# Altium PCB PcbDesign.PcbDoc
Units mil, origin at the board's own origin, x right, y up, seen from the top; angles counter-clockwise.
Board outline 3700.79 x 3700.79 mil, 2 copper layers (Top Layer, Bottom Layer), stack 65.792 mil thick; 1 components, 3 nets, 5 pads, 0 vias.
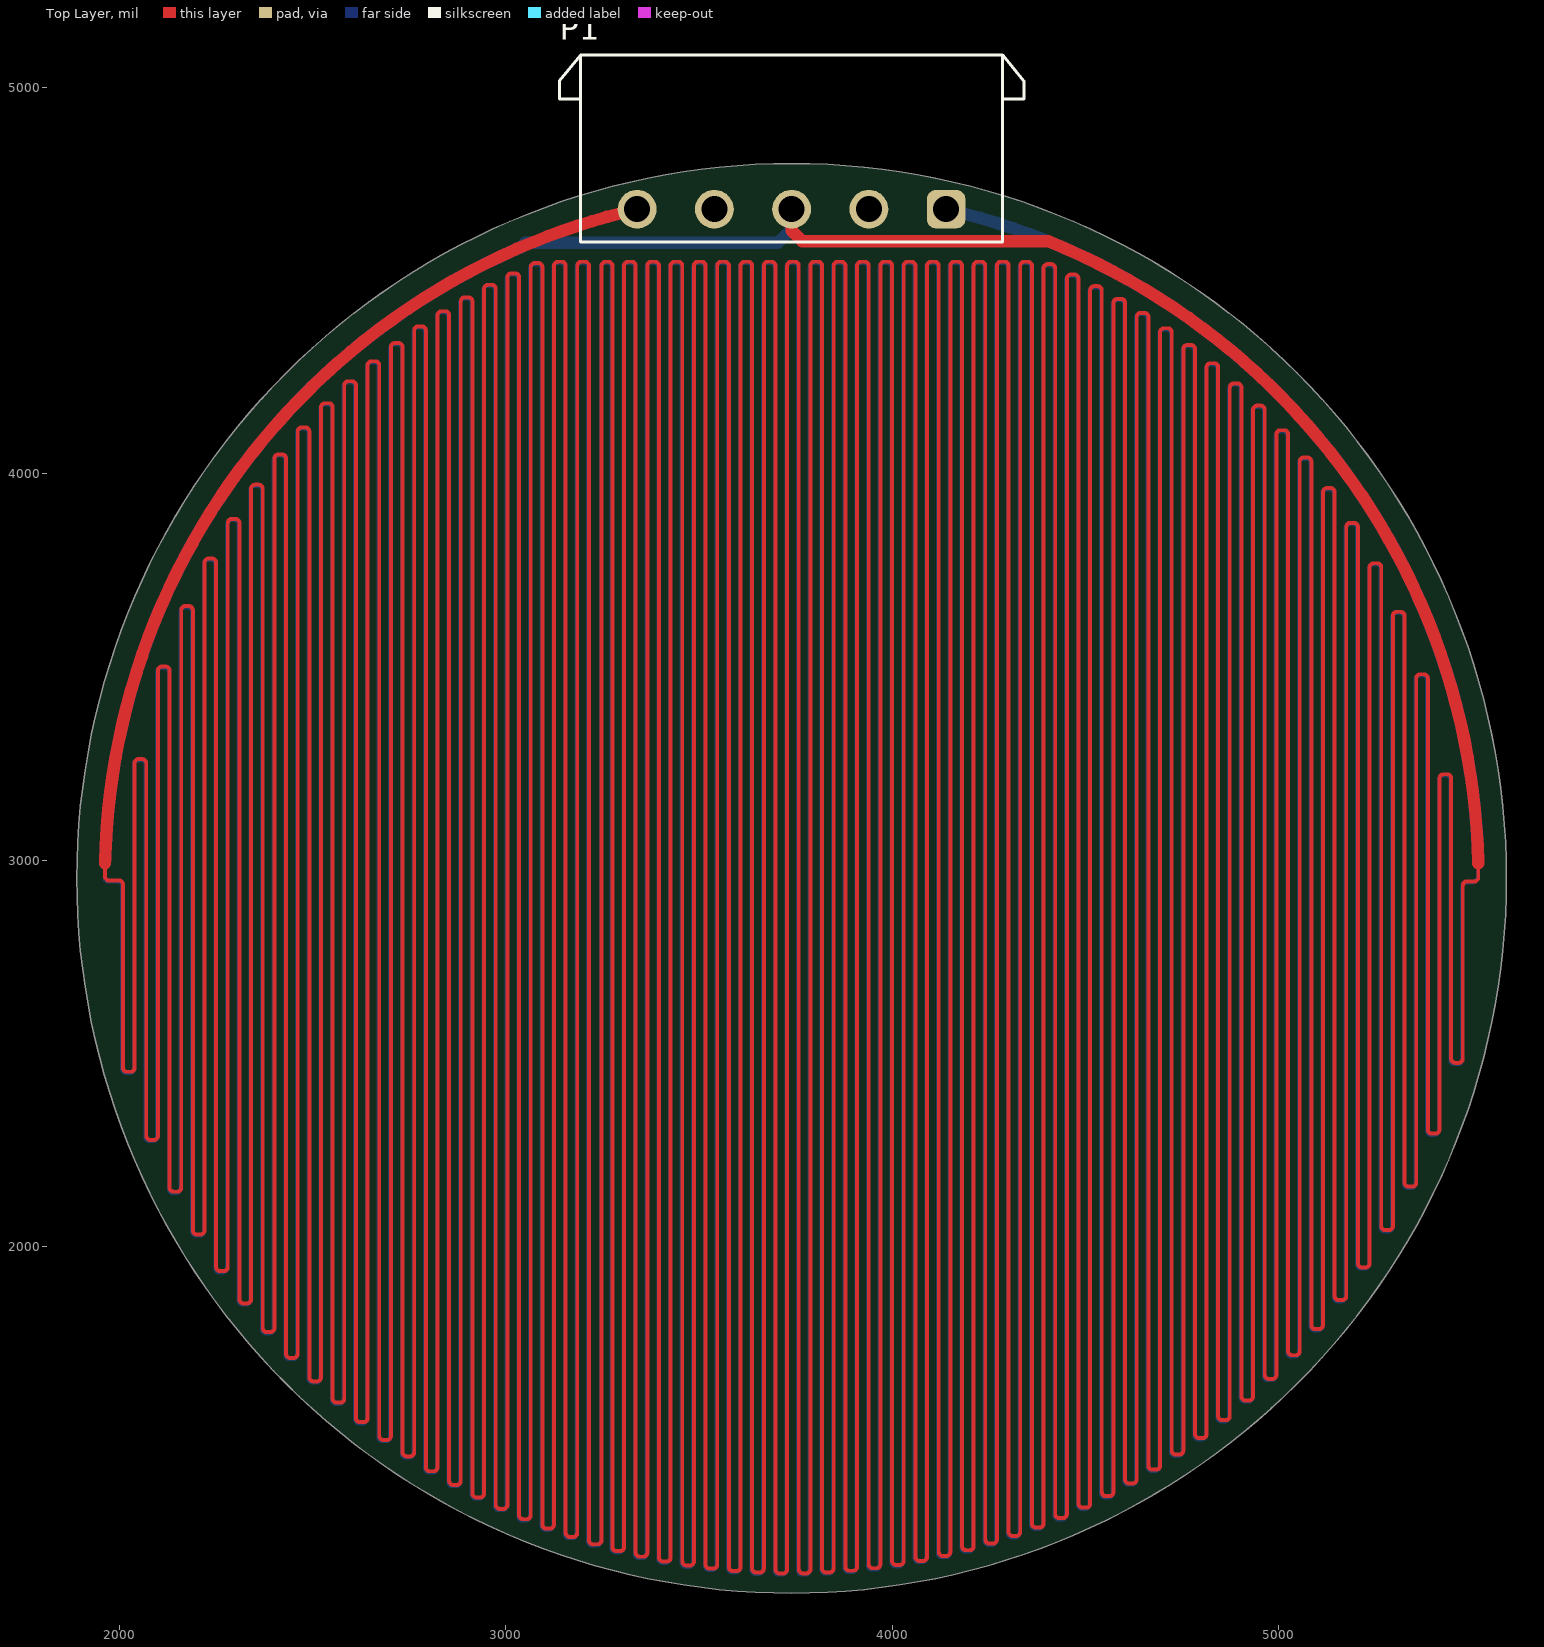
[diagram p0: Top Layer view]
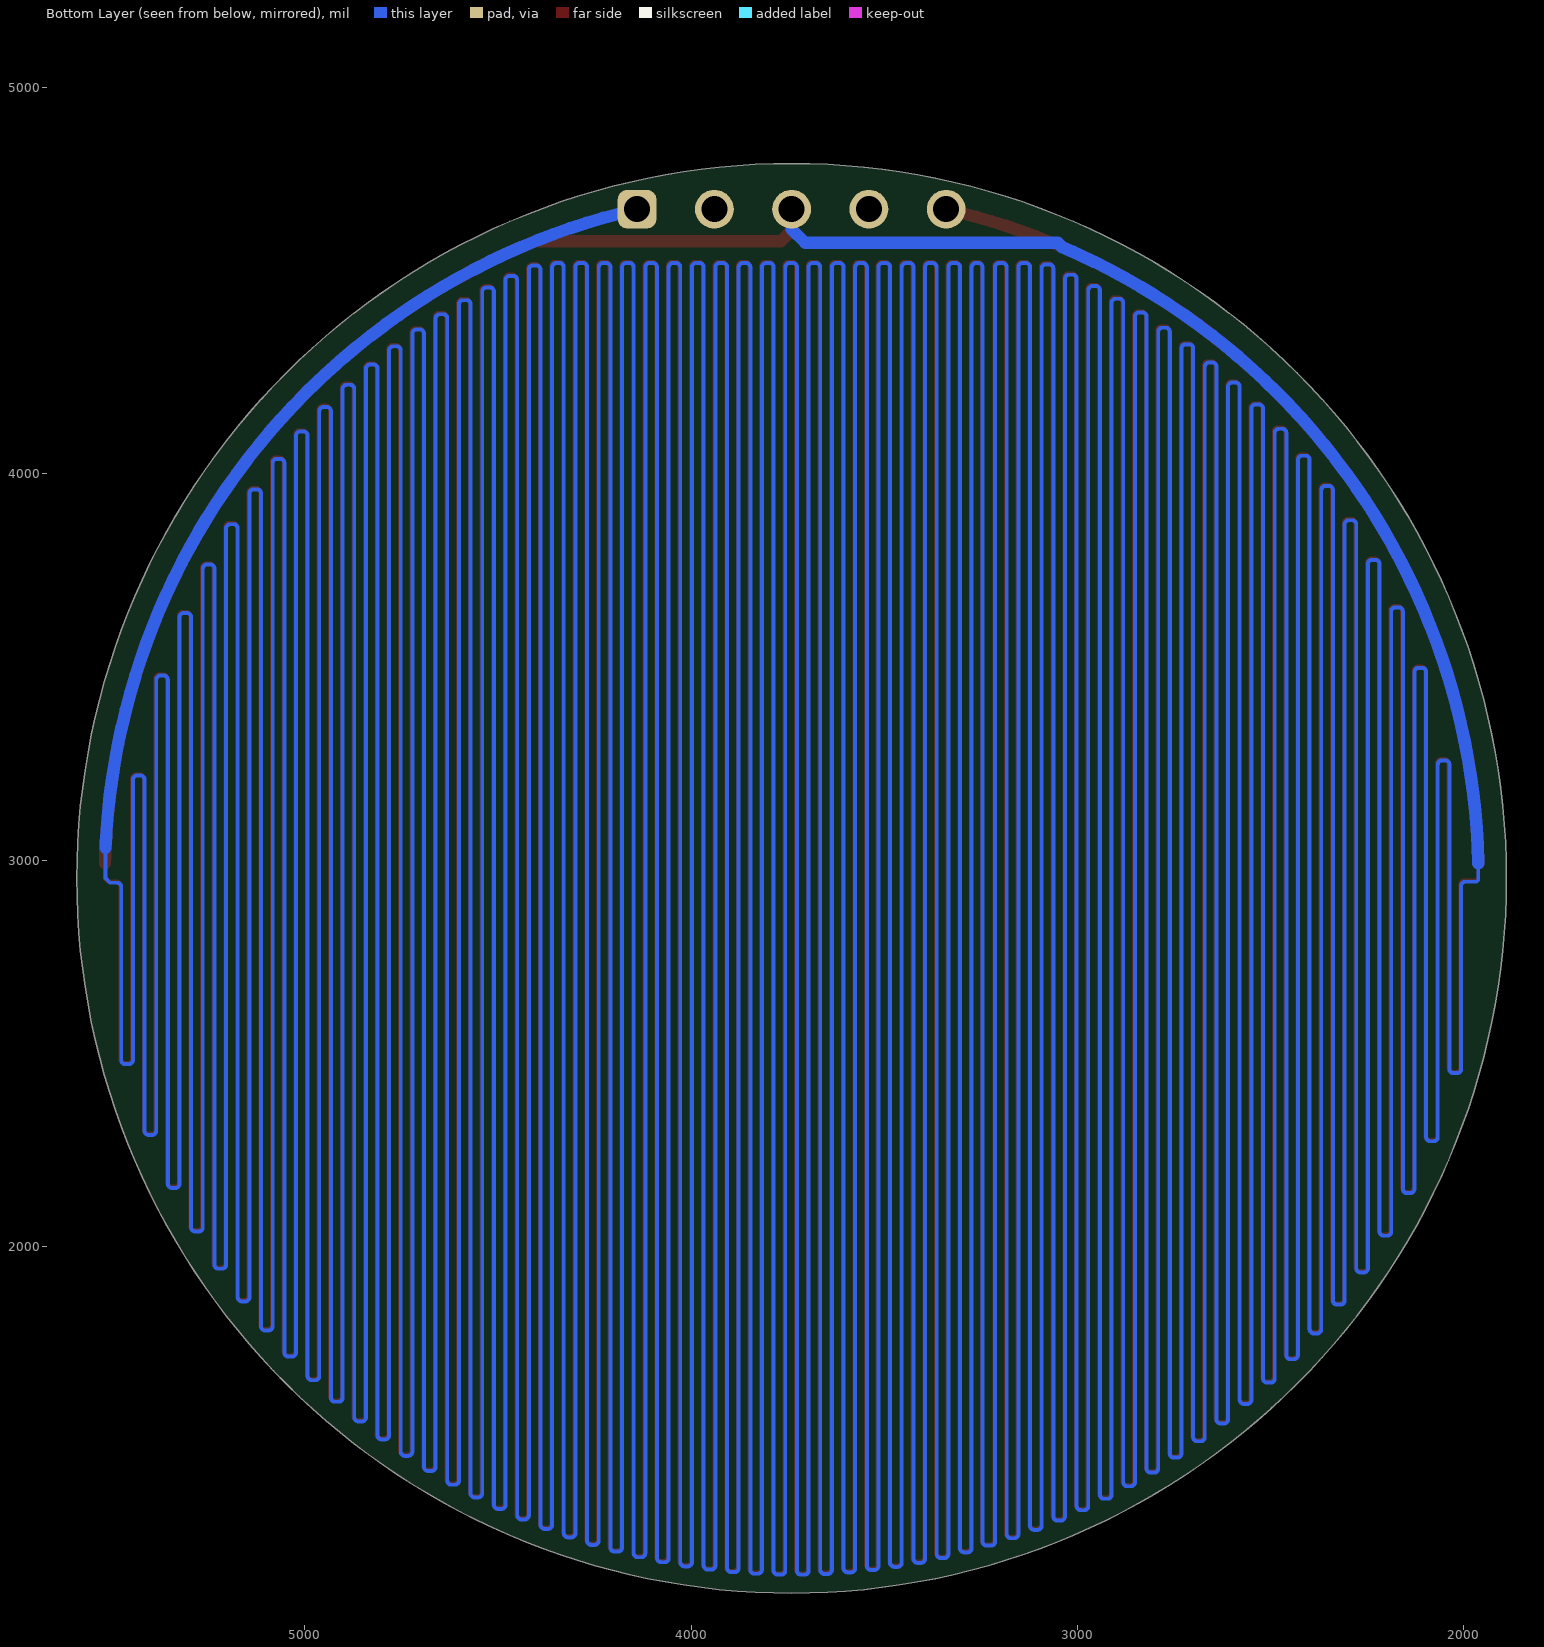
[diagram p1: Bottom Layer view, seen from below]

## Layer stack, top to bottom
Top Solder: solder mask 0.4, Solder Resist, Dk 3.5
Top Layer: signal copper 1.4
Dielectric 1: dielectric 62.9921, FR-4, Dk 4.8
Bottom Layer: signal copper 1.4
Bottom Solder: solder mask 0.4, Solder Resist, Dk 3.5

## Board outline
1889.76,2952.76 ccw(c3740.16,2952.76) 3740.16,1102.36 ccw(c3740.16,2952.76) 5590.55,2952.76 ccw(c3740.16,2952.76) 3740.16,4803.15 ccw(c3740.16,2952.76)

## Design rules (kind name [scope] priority, off if disabled: settings)
Clearance [All] p1: gap=10
Length InNet('NetP1_1')_3 [InNet('NetP1_1')] p1: maxlimit=99999 minlimit=0
Length InNet('NetP1_1')_2 [InNet('NetP1_1')] p2: maxlimit=99999 minlimit=0
Length InNet('NetP1_1')_1 [InNet('NetP1_1')] p3: maxlimit=99999 minlimit=0
Length InNet('NetP1_1') [InNet('NetP1_1')] p4: maxlimit=99999 minlimit=0
PolygonConnect [All] p1: connectstyle=Relief reliefconductorwidth=10 reliefentries=4 polygonreliefangle="90 Angle" airgapwidth=10
RoutingVias [All] p1: holewidth=28 width=50 viastyle="Through Hole" minholewidth=28 minwidth=50 maxholewidth=28 maxwidth=50
SolderMaskExpansion [All] p1: expansion=4
Width [All] p1: maxlimit=32 minlimit=6 preferedwidth=10 minimp=50.000000 maximp=50.000000 favimp=50.000000
30 further rules are at their usual default settings.

## Components (designator, comment, footprint, x,y, rotation, side; value= is the part's Value field where it differs from the comment)
P1 "691305540005" 691305540005 3740.16,4842.52 r180 top

## Footprints (in the part's own frame and the unit in brackets; to place one, negate y for a bottom-side part, rotate by r counter-clockwise, add the part's x,y. Pads: shape width x height; smd on the part's side, far side on the other; paste and mask are expansions set on the pad)
691305540005 [mm] "5,08mm - PCB Header Horizontal Entry with Plastic Latches - 05p"
  rrect50% 2.55x2.55 hole 1.7: 1(-10.16,4)
  round 2.55 hole 1.7: 2(-5.08,4) 3(0,4) 4(5.08,4) 5(10.16,4)
  silkscreen extent -15.27,-6.15 15.27,6.15, body extent -15.1,-6 15.1,6, height 8.63

## Part data
P1: library part CMP-03913-99613978-1, "691305540005 Terminal Block, R/A Header, 5Pos, Th Rohs Compliant: Yes"

## Nets (pads, with @x,y where several pads share a name; then routed paths per layer and width w, separated by ;. In a path a pad name is that pad's centre, name@x,y a point inside that pad or via, vN(x,y) a via of type N, cw(c..) or ccw(c..) an arc to the next point about the centre after c; other vN are vias at no path point)
FUSE_1: P1.2
FUSE_2: P1.4
NetP1_1: P1.1 P1.3 P1.5 | length 650347.3
  Top Layer w10: 1962.73,2992.25 1962.73,2954.27 1969.55,2947.45 1998.68,2947.45 cw(c1998.68,2936.89) 2009.24,2936.89 2009.24,2462.56 ccw(c2019.79,2462.56) 2019.79,2452.01 2028.84,2452.01 ccw(c2028.84,2462.56) 2039.39,2462.56 2039.39,3250.96 cw(c2049.95,3250.96) 2049.95,3261.51 2059,3261.51 cw(c2059,3250.96) 2069.55,3250.96 2069.55,2286.29 ccw(c2080.11,2286.29) 2080.11,2275.73 2089.15,2275.73 ccw(c2089.15,2286.29) 2099.71,2286.29 2099.71,3490.51 cw(c2110.26,3490.51) 2110.26,3501.06 2119.31,3501.06 cw(c2119.31,3490.51) 2129.87,3490.51 2129.87,2152.26 ccw(c2140.42,2152.26) 2140.42,2141.7 2149.47,2141.7 ccw(c2149.47,2152.26) 2160.02,2152.26 2160.02,3647.13 cw(c2170.58,3647.13) 2170.58,3657.68 2179.63,3657.68 cw(c2179.63,3647.13) 2190.18,3647.13 2190.18,2041.64 ccw(c2200.74,2041.64) 2200.74,2031.08 2209.78,2031.08 ccw(c2209.78,2041.64) 2220.34,2041.64 2220.34,3769.98 cw(c2230.89,3769.98) 2230.89,3780.53 2239.94,3780.53 cw(c2239.94,3769.98) 2250.5,3769.98 2250.5,1946.68 ccw(c2261.05,1946.68) 2261.05,1936.12 2270.1,1936.12 ccw(c2270.1,1946.68) 2280.65,1946.68 2280.65,3872.69 cw(c2291.21,3872.69) 2291.21,3883.24 2300.26,3883.24 cw(c2300.26,3872.69) 2310.81,3872.69 2310.81,1863.27 ccw(c2321.37,1863.27) 2321.37,1852.71 2330.41,1852.71 ccw(c2330.41,1863.27) 2340.97,1863.27 2340.97,3961.43 cw(c2351.52,3961.43) 2351.52,3971.99 2360.57,3971.99 cw(c2360.57,3961.43) 2371.13,3961.43 2371.13,1788.93 ccw(c2381.68,1788.93) 2381.68,1778.37 2390.73,1778.37 ccw(c2390.73,1788.93) 2401.28,1788.93 2401.28,4039.63 cw(c2411.84,4039.63) 2411.84,4050.19 2420.89,4050.19 cw(c2420.89,4039.63) 2431.44,4039.63 2431.44,1722.01 ccw(c2442,1722.01) 2442,1711.46 2451.04,1711.46 ccw(c2451.04,1722.01) 2461.6,1722.01 2461.6,4109.43 cw(c2472.15,4109.43) 2472.15,4119.98 2481.2,4119.98 cw(c2481.2,4109.43) 2491.76,4109.43 2491.76,1661.37 ccw(c2502.31,1661.37) 2502.31,1650.81 2511.36,1650.81 ccw(c2511.36,1661.37) 2521.91,1661.37 2521.91,4172.27 cw(c2532.47,4172.27) 2532.47,4182.83 2541.52,4182.83 cw(c2541.52,4172.27) 2552.07,4172.27 2552.07,1606.14 ccw(c2562.63,1606.14) 2562.63,1595.59 2571.67,1595.59 ccw(c2571.67,1606.14) 2582.23,1606.14 2582.23,4229.18 cw(c2592.78,4229.18) 2592.78,4239.74 2601.83,4239.74 cw(c2601.83,4229.18) 2612.39,4229.18 2612.39,1555.7 ccw(c2622.94,1555.7) 2622.94,1545.14 2631.99,1545.14 ccw(c2631.99,1555.7) 2642.54,1555.7 2642.54,4280.92 cw(c2653.1,4280.92) 2653.1,4291.48 2662.15,4291.48 cw(c2662.15,4280.92) 2672.7,4280.92 2672.7,1509.53 ccw(c2683.26,1509.53) 2683.26,1498.97 2692.3,1498.97 ccw(c2692.3,1509.53) 2702.86,1509.53 2702.86,4328.08 cw(c2713.41,4328.08) 2713.41,4338.64 2722.46,4338.64 cw(c2722.46,4328.08) 2733.02,4328.08 2733.02,1467.24 ccw(c2743.57,1467.24) 2743.57,1456.68 2752.62,1456.68 ccw(c2752.62,1467.24) 2763.17,1467.24 2763.17,4371.12 cw(c2773.73,4371.12) 2773.73,4381.67 2782.78,4381.67 cw(c2782.78,4371.12) 2793.33,4371.12 2793.33,1428.5 ccw(c2803.89,1428.5) 2803.89,1417.95 2812.93,1417.95 ccw(c2812.93,1428.5) 2823.49,1428.5 2823.49,4410.39 cw(c2834.04,4410.39) 2834.04,4420.94 2843.09,4420.94 cw(c2843.09,4410.39) 2853.65,4410.39 2853.65,1393.06 ccw(c2864.2,1393.06) 2864.2,1382.51 2873.25,1382.51 ccw(c2873.25,1393.06) 2883.8,1393.06 2883.8,4446.19 cw(c2894.36,4446.19) 2894.36,4456.75 2903.41,4456.75 cw(c2903.41,4446.19) 2913.96,4446.19 2913.96,1360.69 ccw(c2924.52,1360.69) 2924.52,1350.13 2933.56,1350.13 ccw(c2933.56,1360.69) 2944.12,1360.69 2944.12,4478.78 cw(c2954.67,4478.78) 2954.67,4489.33 2963.72,4489.33 cw(c2963.72,4478.78) 2974.28,4478.78 2974.28,1331.2 ccw(c2984.83,1331.2) 2984.83,1320.65 2993.88,1320.65 ccw(c2993.88,1331.2) 3004.43,1331.2 3004.43,4508.34 cw(c3014.99,4508.34) 3014.99,4518.9 3024.04,4518.9 cw(c3024.04,4508.34) 3034.59,4508.34 3034.59,1304.45 ccw(c3045.15,1304.45) 3045.15,1293.9 3054.19,1293.9 ccw(c3054.19,1304.45) 3064.75,1304.45 3064.75,4535.06 cw(c3075.3,4535.06) 3075.3,4545.62 3084.35,4545.62 cw(c3084.35,4535.06) 3094.91,4535.06 3094.91,1280.3 ccw(c3105.46,1280.3) 3105.46,1269.74 3114.51,1269.74 ccw(c3114.51,1280.3) 3125.06,1280.3 3125.06,4538.45 cw(c3135.62,4538.45) 3135.62,4549 3144.67,4549 cw(c3144.67,4538.45) 3155.22,4538.45 3155.22,1258.64 ccw(c3165.78,1258.64) 3165.78,1248.08 3174.82,1248.08 ccw(c3174.82,1258.64) 3185.38,1258.64 3185.38,4538.45 cw(c3195.93,4538.45) 3195.93,4549 3204.98,4549 cw(c3204.98,4538.45) 3210.31,4547.56 cw(c3204.98,4538.45) 3215.54,4538.45 3215.54,1239.37 ccw(c3226.09,1239.37) 3226.09,1228.82 3238.66,1228.9 ; 3238.65,1229.1 ccw(c3237.45,1239.58) 3248,1240 3248,4538.45 ; 3248.32,4538.45 cw(c3258.87,4538.45) 3258.87,4549 ; 3256.56,4549 3258.87,4549 ; 4814.27,1514.81 4814.27,4275.42 4814.08,4275.61 cw(c4824.63,4275.61) 4824.63,4286.16 4833.68,4286.16 cw(c4833.68,4275.61) 4844.24,4275.61 4844.24,1560.89 ccw(c4854.79,1560.89) 4854.79,1550.34 4863.84,1550.34 ccw(c4863.84,1560.89) 4874.39,1560.89 4874.39,4223.34 cw(c4884.95,4223.34) 4884.95,4233.89 4894,4233.89 cw(c4894,4223.34) 4904.55,4223.34 4904.55,1611.82 ccw(c4915.11,1611.82) 4915.11,1601.27 4924.15,1601.27 ccw(c4924.15,1611.82) 4934.71,1611.82 4934.71,4165.83 cw(c4945.26,4165.83) 4945.26,4176.39 4954.31,4176.39 cw(c4954.31,4165.83) 4964.87,4165.83 4964.87,1667.59 ccw(c4975.42,1667.59) 4975.42,1657.04 4984.47,1657.04 ccw(c4984.47,1667.59) 4995.02,1667.59 4995.02,4102.3 cw(c5005.58,4102.3) 5005.58,4112.86 5014.63,4112.86 cw(c5014.63,4102.3) 5025.18,4102.3 5025.18,1728.87 ccw(c5035.74,1728.87) 5035.74,1718.31 5044.78,1718.31 ccw(c5044.78,1728.87) 5055.34,1728.87 5055.34,4031.68 cw(c5065.89,4031.68) 5065.89,4042.24 5074.94,4042.24 cw(c5074.94,4031.68) 5085.5,4031.68 5085.5,1796.52 ccw(c5096.05,1796.52) 5096.05,1785.96 5105.1,1785.96 ccw(c5105.1,1796.52) 5115.65,1796.52 5115.65,3952.47 cw(c5126.21,3952.47) 5126.21,3963.02 5135.26,3963.02 cw(c5135.26,3952.47) 5145.81,3952.47 5145.81,1871.74 ccw(c5156.37,1871.74) 5156.37,1861.19 5165.41,1861.19 ccw(c5165.41,1871.74) 5175.97,1871.74 5175.97,3862.43 cw(c5186.52,3862.43) 5186.52,3872.98 5195.57,3872.98 cw(c5195.57,3862.43) 5206.13,3862.43 5206.13,1956.25 ccw(c5216.68,1956.25) 5216.68,1945.69 5225.73,1945.69 ccw(c5225.73,1956.25) 5236.28,1956.25 5236.28,3757.92 cw(c5246.84,3757.92) 5246.84,3768.48 5255.89,3768.48 cw(c5255.89,3757.92) 5266.44,3757.92 5266.44,2052.65 ccw(c5277,2052.65) 5277,2042.1 5286.04,2042.1 ccw(c5286.04,2052.65) 5296.6,2052.65 5296.6,3632.33 cw(c5307.15,3632.33) 5307.15,3642.88 5316.2,3642.88 cw(c5316.2,3632.33) 5326.76,3632.33 5326.76,2165.31 ccw(c5337.31,2165.31) 5337.31,2154.76 5346.36,2154.76 ccw(c5346.36,2165.31) 5356.91,2165.31 5356.91,3470.5 cw(c5367.47,3470.5) 5367.47,3481.05 5376.52,3481.05 cw(c5376.52,3470.5) 5387.07,3470.5 5387.07,2302.62 ccw(c5397.63,2302.62) 5397.63,2292.07 5406.67,2292.07 ccw(c5406.67,2302.62) 5417.23,2302.62 5417.23,3211.65 cw(c5427.78,3211.65) 5427.78,3222.21 5436.83,3222.21 cw(c5436.83,3211.65) 5447.39,3211.65 5447.39,2485.85 ccw(c5457.94,2485.85) 5457.94,2475.29 5466.99,2475.29 ccw(c5466.99,2485.85) 5477.54,2485.85 5477.54,2934.19 cw(c5488.1,2934.19) 5488.1,2944.75 5510.75,2944.75 5517.58,2951.58 5517.58,2992.25 ; 4814.49,1514.59 cw(c4803.93,1514.59) 4803.93,1504.03 4794.89,1504.03 cw(c4794.89,1514.59) 4784.33,1514.59 4784.33,4322.92 ccw(c4773.78,4322.92) 4773.8,4333.48 4764.73,4333.48 ccw(c4764.73,4322.92) 4754.17,4322.92 4754.17,1471.87 cw(c4743.62,1471.87) 4743.62,1461.32 4734.57,1461.32 cw(c4734.57,1471.87) 4724.02,1471.87 4724.02,4366.41 ccw(c4713.46,4366.41) 4713.46,4376.96 4704.41,4376.96 ccw(c4704.41,4366.41) 4693.86,4366.41 4693.86,1432.75 cw(c4683.3,1432.75) 4683.3,1422.19 4674.26,1422.19 cw(c4674.26,1432.75) 4663.7,1432.75 4663.7,4406.09 ccw(c4653.15,4406.09) 4653.15,4416.64 4644.1,4416.64 ccw(c4644.1,4406.09) 4633.54,4406.09 4633.54,1396.94 cw(c4622.99,1396.94) 4622.99,1386.39 4613.94,1386.39 cw(c4613.94,1396.94) 4603.39,1396.94 4603.39,4442.28 ccw(c4592.83,4442.28) 4592.83,4452.83 4583.78,4452.83 ccw(c4583.78,4442.28) 4573.23,4442.28 4573.23,1364.23 cw(c4562.67,1364.23) 4562.67,1353.67 4553.63,1353.67 cw(c4553.63,1364.23) 4543.07,1364.23 4543.07,4475.22 ccw(c4532.52,4475.22) 4532.52,4485.77 4523.47,4485.77 ccw(c4523.47,4475.22) 4512.91,4475.22 4512.91,1334.42 cw(c4502.36,1334.42) 4502.36,1323.87 4493.31,1323.87 cw(c4493.31,1334.42) 4482.76,1334.42 4482.76,4505.12 ccw(c4472.2,4505.12) 4472.2,4515.68 4463.15,4515.68 ccw(c4463.15,4505.12) 4452.6,4505.12 4452.6,1307.37 cw(c4442.04,1307.37) 4442.04,1296.81 4433,1296.81 cw(c4433,1307.37) 4422.44,1307.37 4422.44,4532.16 ccw(c4411.89,4532.16) 4411.89,4542.71 4402.84,4542.71 ccw(c4402.84,4532.16) 4392.28,4532.16 4392.28,1282.93 cw(c4381.73,1282.93) 4381.73,1272.37 4372.68,1272.37 cw(c4372.68,1282.93) 4362.13,1282.93 4362.13,4538.45 ccw(c4351.57,4538.45) 4351.57,4549 4342.52,4549 ccw(c4342.52,4538.45) 4331.97,4538.45 4331.97,1260.98 cw(c4321.41,1260.98) 4321.41,1250.43 4312.37,1250.43 cw(c4312.37,1260.98) 4301.81,1260.98 4301.81,4538.45 ccw(c4291.26,4538.45) 4291.26,4549 4282.21,4549 ccw(c4282.21,4538.45) 4271.65,4538.45 4271.65,1241.45 cw(c4261.1,1241.45) 4261.1,1230.89 4252.05,1230.89 cw(c4252.05,1241.45) 4241.5,1241.45 4241.5,4538.45 ccw(c4230.94,4538.45) 4230.94,4549 4221.89,4549 ccw(c4221.89,4538.45) 4211.34,4538.45 4211.34,1224.24 cw(c4200.78,1224.24) 4200.78,1213.68 4191.74,1213.68 cw(c4191.74,1224.24) 4181.18,1224.24 4181.18,4538.45 ccw(c4170.63,4538.45) 4170.63,4549 4161.58,4549 ccw(c4161.58,4538.45) 4151.02,4538.45 4151.02,1209.28 cw(c4140.47,1209.28) 4140.47,1198.73 4131.42,1198.73 cw(c4131.42,1209.28) 4120.87,1209.28 4120.87,4538.45 ccw(c4110.31,4538.45) 4110.31,4549 4101.26,4549 ccw(c4101.26,4538.45) 4090.71,4538.45 4090.71,1196.52 cw(c4080.15,1196.52) 4080.15,1185.97 4071.11,1185.97 cw(c4071.11,1196.52) 4060.55,1196.52 4060.55,4538.45 ccw(c4050,4538.45) 4050,4549 4040.95,4549 ccw(c4040.95,4538.45) 4030.39,4538.45 4030.39,1185.91 cw(c4019.84,1185.91) 4019.84,1175.36 4010.79,1175.36 cw(c4010.79,1185.91) 4000.24,1185.91 4000.24,4538.45 ccw(c3989.68,4538.45) 3989.68,4549 3980.63,4549 ccw(c3980.63,4538.45) 3970.08,4538.45 3970.08,1177.81 3969.78,1177.51 cw(c3959.22,1177.51) 3967.25,1170.65 cw(c3959.22,1177.51) 3959.22,1166.96 3950.18,1166.96 cw(c3950.18,1177.51) 3939.62,1177.51 3939.62,4538.45 ccw(c3929.07,4538.45) 3935.35,4546.93 ccw(c3929.07,4538.45) 3929.07,4549 3920.02,4549 ccw(c3920.02,4538.45) 3909.47,4538.45 3909.47,1171.07 cw(c3898.91,1171.07) 3898.91,1160.52 3889.86,1160.52 cw(c3889.86,1171.07) 3879.31,1171.07 3879.31,4538.45 ccw(c3868.75,4538.45) 3868.75,4549 3859.71,4549 ccw(c3859.71,4538.45) 3849.15,4538.45 3849.15,1166.69 cw(c3838.59,1166.69) 3838.59,1156.13 3829.55,1156.13 cw(c3829.55,1166.69) 3818.99,1166.69 3818.99,4538.45 ccw(c3808.44,4538.45) 3808.44,4549 3799.39,4549 ccw(c3799.39,4538.45) 3788.84,4538.45 3788.84,1164.35 cw(c3778.28,1164.35) 3778.28,1153.79 3769.23,1153.79 cw(c3769.23,1164.35) 3758.68,1164.35 3758.68,4538.45 ccw(c3748.12,4538.45) 3748.12,4549 3739.08,4549 ccw(c3739.08,4538.45) 3728.52,4538.45 3728.52,1164.17 cw(c3717.96,1164.17) 3717.96,1153.62 3708.92,1153.62 cw(c3708.92,1164.17) 3698.36,1164.17 3698.36,4538.45 ccw(c3687.81,4538.45) 3687.81,4549 3678.76,4549 ccw(c3678.76,4538.45) 3668.2,4538.45 3668.2,1166.21 cw(c3657.65,1166.21) 3657.65,1155.65 3648.6,1155.65 cw(c3648.6,1166.21) 3638.05,1166.21 3638.05,4538.45 ccw(c3627.49,4538.45) 3627.49,4549 3618.45,4549 ccw(c3618.45,4538.45) 3607.89,4538.45 3607.89,1170.28 cw(c3597.33,1170.28) 3597.33,1159.73 3588.29,1159.73 cw(c3588.29,1170.28) 3577.73,1170.28 3577.73,4538.45 ccw(c3567.18,4538.45) 3567.18,4549 3558.13,4549 ccw(c3558.13,4538.45) 3547.57,4538.45 3547.57,1176.42 cw(c3537.02,1176.42) 3537.02,1165.86 3527.97,1165.86 cw(c3527.97,1176.42) 3517.42,1176.42 3517.42,4538.45 ccw(c3506.86,4538.45) 3506.86,4549 3497.82,4549 ccw(c3497.82,4538.45) 3487.26,4538.45 3487.26,1184.63 cw(c3476.7,1184.63) 3476.7,1174.07 3467.66,1174.07 cw(c3467.66,1184.63) 3457.1,1184.63 3457.1,4538.45 ccw(c3446.55,4538.45) 3446.55,4549 3437.5,4549 ccw(c3437.5,4538.45) 3426.95,4538.45 3426.95,1194.94 cw(c3416.39,1194.94) 3416.39,1184.39 3407.34,1184.39 cw(c3407.34,1194.94) 3396.79,1194.94 3396.79,4538.45 ccw(c3386.23,4538.45) 3386.23,4549 3377.19,4549 ccw(c3377.19,4538.45) 3366.63,4538.45 3366.63,1207.41 cw(c3356.07,1207.41) 3356.07,1196.85 3347.03,1196.85 cw(c3347.03,1207.41) 3336.47,1207.41 3336.47,4538.45 ccw(c3325.92,4538.45) 3325.92,4549 3316.87,4549 ccw(c3316.87,4538.45) 3306.32,4538.45 3306.32,1222.06 cw(c3295.76,1222.06) 3295.76,1211.5 3286.71,1211.5 cw(c3286.71,1222.06) 3276.16,1222.06 3276.16,4538.45 ccw(c3265.6,4538.45) 3265.6,4549 3258.87,4549
  Top Layer w32: P1.5 ccw(c3740.16,2952.76) 3071.28,4600 ccw(c3740.16,2952.76) 1962.73,2992.25 ; P1.3 3740.16,4629.84 3768,4602 4405,4602 ; 4404.87,4601.68 cw(c3740.16,2952.76) 5517.58,2992.25 ; 1962.73,2992.25 cw(c3740.16,2952.76) 1963.27,3011.7 ; 1962.73,2992.25 cw(c3740.16,2952.76) 1963.27,3011.7 ; 1962.73,2992.25 cw(c3740.16,2952.76) 1963.27,3011.7 ; 5516.62,3023.27 cw(c3740.16,2952.76) 5517.58,2992.25 ; 5516.62,3023.27 cw(c3740.16,2952.76) 5517.58,2992.25 ; 5516.62,3023.27 cw(c3740.16,2952.76) 5517.58,2992.25
  Bottom Layer w10: 1962.73,2992.25 1962.73,2948.76 1967.49,2944 1996.62,2944 cw(c1996.62,2933.44) 2007.17,2933.44 2007.17,2459.12 ccw(c2017.73,2459.12) 2017.73,2448.56 2026.77,2448.56 ccw(c2026.77,2459.12) 2037.33,2459.12 2037.33,3247.51 cw(c2047.89,3247.51) 2047.89,3258.06 2056.93,3258.06 cw(c2056.93,3247.51) 2067.49,3247.51 2067.49,2282.84 ccw(c2078.04,2282.84) 2078.04,2272.29 2087.09,2272.29 ccw(c2087.09,2282.84) 2097.64,2282.84 2097.64,3487.06 cw(c2108.2,3487.06) 2108.2,3497.61 2117.25,3497.61 cw(c2117.25,3487.06) 2127.8,3487.06 2127.8,2148.81 ccw(c2138.36,2148.81) 2138.36,2138.26 2147.4,2138.26 ccw(c2147.4,2148.81) 2157.96,2148.81 2157.96,3643.68 cw(c2168.52,3643.68) 2168.52,3654.24 2177.56,3654.24 cw(c2177.56,3643.68) 2188.12,3643.68 2188.12,2038.19 ccw(c2198.67,2038.19) 2198.67,2027.64 2207.72,2027.64 ccw(c2207.72,2038.19) 2218.28,2038.19 2218.28,3766.53 cw(c2228.83,3766.53) 2228.83,3777.09 2237.88,3777.09 cw(c2237.88,3766.53) 2248.43,3766.53 2248.43,1943.23 ccw(c2258.99,1943.23) 2258.99,1932.68 2268.03,1932.68 ccw(c2268.03,1943.23) 2278.59,1943.23 2278.59,3869.24 cw(c2289.15,3869.24) 2289.15,3879.8 2298.19,3879.8 cw(c2298.19,3869.24) 2308.75,3869.24 2308.75,1859.82 ccw(c2319.3,1859.82) 2319.3,1849.27 2328.35,1849.27 ccw(c2328.35,1859.82) 2338.91,1859.82 2338.91,3957.98 cw(c2349.46,3957.98) 2349.46,3968.54 2358.51,3968.54 cw(c2358.51,3957.98) 2369.06,3957.98 2369.06,1785.48 ccw(c2379.62,1785.48) 2379.62,1774.93 2388.66,1774.93 ccw(c2388.66,1785.48) 2399.22,1785.48 2399.22,4036.18 cw(c2409.78,4036.18) 2409.78,4046.74 2418.82,4046.74 cw(c2418.82,4036.18) 2429.38,4036.18 2429.38,1718.57 ccw(c2439.93,1718.57) 2439.93,1708.01 2448.98,1708.01 ccw(c2448.98,1718.57) 2459.53,1718.57 2459.53,4105.98 cw(c2470.09,4105.98) 2470.09,4116.54 2479.14,4116.54 cw(c2479.14,4105.98) 2489.69,4105.98 2489.69,1657.92 ccw(c2500.25,1657.92) 2500.25,1647.37 2509.29,1647.37 ccw(c2509.29,1657.92) 2519.85,1657.92 2519.85,4168.82 cw(c2530.41,4168.82) 2530.41,4179.38 2539.45,4179.38 cw(c2539.45,4168.82) 2550.01,4168.82 2550.01,1602.7 ccw(c2560.56,1602.7) 2560.56,1592.14 2569.61,1592.14 ccw(c2569.61,1602.7) 2580.16,1602.7 2580.16,4225.73 cw(c2590.72,4225.73) 2590.72,4236.29 2599.77,4236.29 cw(c2599.77,4225.73) 2610.32,4225.73 2610.32,1552.25 ccw(c2620.88,1552.25) 2620.88,1541.69 2629.92,1541.69 ccw(c2629.92,1552.25) 2640.48,1552.25 2640.48,4277.48 cw(c2651.04,4277.48) 2651.04,4288.03 2660.08,4288.03 cw(c2660.08,4277.48) 2670.64,4277.48 2670.64,1506.08 ccw(c2681.19,1506.08) 2681.19,1495.53 2690.24,1495.53 ccw(c2690.24,1506.08) 2700.8,1506.08 2700.8,4324.64 cw(c2711.35,4324.64) 2711.35,4335.19 2720.4,4335.19 cw(c2720.4,4324.64) 2730.95,4324.64 2730.95,1463.79 ccw(c2741.51,1463.79) 2741.51,1453.24 2750.55,1453.24 ccw(c2750.55,1463.79) 2761.11,1463.79 2761.11,4367.67 cw(c2771.67,4367.67) 2771.67,4378.22 2780.71,4378.22 cw(c2780.71,4367.67) 2791.27,4367.67 2791.27,1425.06 ccw(c2801.82,1425.06) 2801.82,1414.5 2810.87,1414.5 ccw(c2810.87,1425.06) 2821.43,1425.06 2821.43,4406.94 cw(c2831.98,4406.94) 2831.98,4417.49 2841.03,4417.49 cw(c2841.03,4406.94) 2851.58,4406.94 2851.58,1389.61 ccw(c2862.14,1389.61) 2862.14,1379.06 2871.18,1379.06 ccw(c2871.18,1389.61) 2881.74,1389.61 2881.74,4442.75 cw(c2892.3,4442.75) 2892.3,4453.3 2901.34,4453.3 cw(c2901.34,4442.75) 2911.9,4442.75 2911.9,1357.24 ccw(c2922.45,1357.24) 2922.45,1346.69 2931.5,1346.69 ccw(c2931.5,1357.24) 2942.05,1357.24 2942.05,4475.33 cw(c2952.61,4475.33) 2952.61,4485.89 2961.66,4485.89 cw(c2961.66,4475.33) 2972.21,4475.33 2972.21,1327.76 ccw(c2982.77,1327.76) 2982.77,1317.2 2991.81,1317.2 ccw(c2991.81,1327.76) 3002.37,1327.76 3002.37,4504.9 cw(c3012.93,4504.9) 3012.93,4515.45 3021.97,4515.45 cw(c3021.97,4504.9) 3032.53,4504.9 3032.53,1301.01 ccw(c3043.08,1301.01) 3043.08,1290.45 3052.13,1290.45 ccw(c3052.13,1301.01) 3062.68,1301.01 3062.68,4531.62 cw(c3073.24,4531.62) 3073.24,4542.17 3082.29,4542.17 cw(c3082.29,4531.62) 3092.84,4531.62 3092.84,1276.85 ccw(c3103.4,1276.85) 3103.4,1266.3 3112.44,1266.3 ccw(c3112.44,1276.85) 3123,1276.85 3123,4535 cw(c3133.56,4535) 3133.56,4545.56 3142.6,4545.56 cw(c3142.6,4535) 3153.16,4535 3153.16,1255.19 ccw(c3163.71,1255.19) 3163.71,1244.64 3172.76,1244.64 ccw(c3172.76,1255.19) 3183.32,1255.19 3183.32,4535 cw(c3193.87,4535) 3193.87,4545.56 3202.92,4545.56 cw(c3202.92,4535) 3208.24,4544.11 cw(c3202.92,4535) 3213.47,4535 3213.47,1235.93 ccw(c3224.03,1235.93) 3224.03,1225.37 3236.59,1225.45 ; 3236.59,1225.65 ccw(c3235.39,1236.14) 3245.94,1236.55 3245.94,4535 ; 3246.25,4535 cw(c3256.81,4535) 3256.81,4545.56 ; 3254.49,4545.56 3256.81,4545.56 ; 4771.71,4330.03 4762.67,4330.03 ccw(c4762.67,4319.48) 4752.11,4319.48 4752.11,1468.43 cw(c4741.55,1468.43) 4741.55,1457.87 4732.51,1457.87 cw(c4732.51,1468.43) 4721.95,1468.43 4721.95,4362.96 ccw(c4711.4,4362.96) 4711.4,4373.52 4702.35,4373.52 ccw(c4702.35,4362.96) 4691.8,4362.96 4691.8,1429.3 cw(c4681.24,1429.3) 4681.24,1418.75 4672.19,1418.75 cw(c4672.19,1429.3) 4661.64,1429.3 4661.64,4402.64 ccw(c4651.08,4402.64) 4651.08,4413.2 4642.04,4413.2 ccw(c4642.04,4402.64) 4631.48,4402.64 4631.48,1393.5 cw(c4620.92,1393.5) 4620.92,1382.94 4611.88,1382.94 cw(c4611.88,1393.5) 4601.32,1393.5 4601.32,4438.83 ccw(c4590.77,4438.83) 4590.77,4449.39 4581.72,4449.39 ccw(c4581.72,4438.83) 4571.16,4438.83 4571.16,1360.78 cw(c4560.61,1360.78) 4560.61,1350.23 4551.56,1350.23 cw(c4551.56,1360.78) 4541.01,1360.78 4541.01,4471.77 ccw(c4530.45,4471.77) 4530.45,4482.33 4521.41,4482.33 ccw(c4521.41,4471.77) 4510.85,4471.77 4510.85,1330.98 cw(c4500.29,1330.98) 4500.29,1320.42 4491.25,1320.42 cw(c4491.25,1330.98) 4480.69,1330.98 4480.69,4501.68 ccw(c4470.14,4501.68) 4470.14,4512.23 4461.09,4512.23 ccw(c4461.09,4501.68) 4450.54,4501.68 4450.53,1303.92 cw(c4439.98,1303.92) 4439.98,1293.37 4430.93,1293.37 cw(c4430.93,1303.92) 4420.38,1303.92 4420.38,4528.71 ccw(c4409.82,4528.71) 4409.82,4539.27 4400.78,4539.27 ccw(c4400.78,4528.71) 4390.22,4528.71 4390.22,1279.48 cw(c4379.66,1279.48) 4379.66,1268.92 4370.62,1268.92 cw(c4370.62,1279.48) 4360.06,1279.48 4360.06,4535 ccw(c4349.51,4535) 4349.51,4545.56 4340.46,4545.56 ccw(c4340.46,4535) 4329.91,4535 4329.9,1257.54 cw(c4319.35,1257.54) 4319.35,1246.98 4310.3,1246.98 cw(c4310.3,1257.54) 4299.75,1257.54 4299.75,4535 ccw(c4289.19,4535) 4289.19,4545.56 4280.15,4545.56 ccw(c4280.15,4535) 4269.59,4535 4269.59,1238 cw(c4259.03,1238) 4259.03,1227.45 4249.99,1227.45 cw(c4249.99,1238) 4239.43,1238 4239.43,4535 ccw(c4228.88,4535) 4228.88,4545.56 4219.83,4545.56 ccw(c4219.83,4535) 4209.28,4535 4209.27,1220.79 cw(c4198.72,1220.79) 4198.72,1210.24 4189.67,1210.24 cw(c4189.67,1220.79) 4179.12,1220.79 4179.12,4535 ccw(c4168.56,4535) 4168.56,4545.56 4159.52,4545.56 ccw(c4159.52,4535) 4148.96,4535 4148.96,1205.84 cw(c4138.4,1205.84) 4138.4,1195.28 4129.36,1195.28 cw(c4129.36,1205.84) 4118.8,1205.84 4118.8,4535 ccw(c4108.25,4535) 4108.25,4545.56 4099.2,4545.56 ccw(c4099.2,4535) 4088.64,4535 4088.64,1193.08 cw(c4078.09,1193.08) 4078.09,1182.52 4069.04,1182.52 cw(c4069.04,1193.08) 4058.49,1193.08 4058.49,4535 ccw(c4047.93,4535) 4047.93,4545.56 4038.89,4545.56 ccw(c4038.89,4535) 4028.33,4535 4028.33,1182.47 cw(c4017.77,1182.47) 4017.77,1171.91 4008.73,1171.91 cw(c4008.73,1182.47) 3998.17,1182.47 3998.17,4535 ccw(c3987.62,4535) 3987.62,4545.56 3978.57,4545.56 ccw(c3978.57,4535) 3968.01,4535 3968.01,1174.37 3967.72,1174.07 cw(c3957.16,1174.07) 3965.18,1167.21 cw(c3957.16,1174.07) 3957.16,1163.51 3948.11,1163.51 cw(c3948.11,1174.07) 3937.56,1174.07 3937.56,4535 ccw(c3927,4535) 3933.29,4543.48 ccw(c3927,4535) 3927,4545.56 3917.96,4545.56 ccw(c3917.96,4535) 3907.4,4535 3907.4,1167.62 cw(c3896.85,1167.62) 3896.85,1157.07 3887.8,1157.07 cw(c3887.8,1167.62) 3877.24,1167.62 3877.24,4535 ccw(c3866.69,4535) 3866.69,4545.56 3857.64,4545.56 ccw(c3857.64,4535) 3847.09,4535 3847.09,1163.24 cw(c3836.53,1163.24) 3836.53,1152.68 3827.48,1152.68 cw(c3827.48,1163.24) 3816.93,1163.24 3816.93,4535 ccw(c3806.37,4535) 3806.37,4545.56 3797.33,4545.56 ccw(c3797.33,4535) 3786.77,4535 3786.77,1160.9 cw(c3776.22,1160.9) 3776.22,1150.34 3767.17,1150.34 cw(c3767.17,1160.9) 3756.61,1160.9 3756.61,4535 ccw(c3746.06,4535) 3746.06,4545.56 3737.01,4545.56 ccw(c3737.01,4535) 3726.46,4535 3726.46,1160.72 cw(c3715.9,1160.72) 3715.9,1150.17 3706.85,1150.17 cw(c3706.85,1160.72) 3696.3,1160.72 3696.3,4535 ccw(c3685.74,4535) 3685.74,4545.56 3676.7,4545.56 ccw(c3676.7,4535) 3666.14,4535 3666.14,1162.76 cw(c3655.59,1162.76) 3655.59,1152.2 3646.54,1152.2 cw(c3646.54,1162.76) 3635.98,1162.76 3635.98,4535 ccw(c3625.43,4535) 3625.43,4545.56 3616.38,4545.56 ccw(c3616.38,4535) 3605.83,4535 3605.83,1166.84 cw(c3595.27,1166.84) 3595.27,1156.28 3586.22,1156.28 cw(c3586.22,1166.84) 3575.67,1166.84 3575.67,4535 ccw(c3565.11,4535) 3565.11,4545.56 3556.07,4545.56 ccw(c3556.07,4535) 3545.51,4535 3545.51,1172.97 cw(c3534.96,1172.97) 3534.96,1162.42 3525.91,1162.42 cw(c3525.91,1172.97) 3515.35,1172.97 3515.35,4535 ccw(c3504.8,4535) 3504.8,4545.56 3495.75,4545.56 ccw(c3495.75,4535) 3485.2,4535 3485.2,1181.18 cw(c3474.64,1181.18) 3474.64,1170.63 3465.59,1170.63 cw(c3465.59,1181.18) 3455.04,1181.18 3455.04,4535 ccw(c3444.48,4535) 3444.48,4545.56 3435.44,4545.56 ccw(c3435.44,4535) 3424.88,4535 3424.88,1191.5 cw(c3414.33,1191.5) 3414.33,1180.94 3405.28,1180.94 cw(c3405.28,1191.5) 3394.72,1191.5 3394.72,4535 ccw(c3384.17,4535) 3384.17,4545.56 3375.12,4545.56 ccw(c3375.12,4535) 3364.57,4535 3364.57,1203.96 cw(c3354.01,1203.96) 3354.01,1193.4 3344.96,1193.4 cw(c3344.96,1203.96) 3334.41,1203.96 3334.41,4535 ccw(c3323.85,4535) 3323.85,4545.56 3314.81,4545.56 ccw(c3314.81,4535) 3304.25,4535 3304.25,1218.61 cw(c3293.7,1218.61) 3293.7,1208.06 3284.65,1208.06 cw(c3284.65,1218.61) 3274.09,1218.61 3274.09,4535 ccw(c3263.54,4535) 3263.54,4545.56 3256.81,4545.56 ; 4771.74,4330.03 cw(c4771.71,4319.48) 4782.27,4319.48 4782.27,1511.14 ccw(c4792.82,1511.14) 4792.82,1500.59 4801.87,1500.59 ccw(c4801.87,1511.14) 4812.42,1511.14 ; 4812.2,1511.36 4812.2,4271.97 4812.02,4272.16 cw(c4822.57,4272.16) 4822.57,4282.72 4831.62,4282.72 cw(c4831.62,4272.16) 4842.17,4272.16 4842.17,1557.44 ccw(c4852.73,1557.44) 4852.73,1546.89 4861.77,1546.89 ccw(c4861.77,1557.44) 4872.33,1557.44 4872.33,4219.89 cw(c4882.89,4219.89) 4882.89,4230.45 4891.93,4230.45 cw(c4891.93,4219.89) 4902.49,4219.89 4902.49,1608.38 ccw(c4913.04,1608.38) 4913.04,1597.82 4922.09,1597.82 ccw(c4922.09,1608.38) 4932.64,1608.38 4932.65,4162.39 cw(c4943.2,4162.39) 4943.2,4172.94 4952.25,4172.94 cw(c4952.25,4162.39) 4962.8,4162.39 4962.8,1664.15 ccw(c4973.36,1664.15) 4973.36,1653.59 4982.4,1653.59 ccw(c4982.4,1664.15) 4992.96,1664.15 4992.96,4098.86 cw(c5003.52,4098.86) 5003.52,4109.41 5012.56,4109.41 cw(c5012.56,4098.86) 5023.12,4098.86 5023.12,1725.42 ccw(c5033.67,1725.42) 5033.67,1714.87 5042.72,1714.87 ccw(c5042.72,1725.42) 5053.27,1725.42 5053.27,4028.24 cw(c5063.83,4028.24) 5063.83,4038.79 5072.88,4038.79 cw(c5072.88,4028.24) 5083.43,4028.24 5083.43,1793.07 ccw(c5093.99,1793.07) 5093.99,1782.52 5103.03,1782.52 ccw(c5103.03,1793.07) 5113.59,1793.07 5113.59,3949.02 cw(c5124.15,3949.02) 5124.15,3959.58 5133.19,3959.58 cw(c5133.19,3949.02) 5143.75,3949.02 5143.75,1868.29 ccw(c5154.3,1868.29) 5154.3,1857.74 5163.35,1857.74 ccw(c5163.35,1868.29) 5173.9,1868.29 5173.9,3858.98 cw(c5184.46,3858.98) 5184.46,3869.53 5193.51,3869.53 cw(c5193.51,3858.98) 5204.06,3858.98 5204.06,1952.8 ccw(c5214.62,1952.8) 5214.62,1942.25 5223.66,1942.25 ccw(c5223.66,1952.8) 5234.22,1952.8 5234.22,3754.48 cw(c5244.78,3754.48) 5244.78,3765.03 5253.82,3765.03 cw(c5253.82,3754.48) 5264.38,3754.48 5264.38,2049.21 ccw(c5274.93,2049.21) 5274.93,2038.65 5283.98,2038.65 ccw(c5283.98,2049.21) 5294.53,2049.21 5294.53,3628.88 cw(c5305.09,3628.88) 5305.09,3639.43 5314.14,3639.43 cw(c5314.14,3628.88) 5324.69,3628.88 5324.69,2161.87 ccw(c5335.25,2161.87) 5335.25,2151.31 5344.29,2151.31 ccw(c5344.29,2161.87) 5354.85,2161.87 5354.85,3467.05 cw(c5365.41,3467.05) 5365.41,3477.61 5374.45,3477.61 cw(c5374.45,3467.05) 5385.01,3467.05 5385.01,2299.18 ccw(c5395.56,2299.18) 5395.56,2288.62 5404.61,2288.62 ccw(c5404.61,2299.18) 5415.16,2299.18 5415.16,3208.21 cw(c5425.72,3208.21) 5425.72,3218.76 5434.77,3218.76 cw(c5434.77,3208.21) 5445.32,3208.21 5445.32,2482.4 ccw(c5455.88,2482.4) 5455.88,2471.84 5464.92,2471.84 ccw(c5464.92,2482.4) 5475.48,2482.4 5475.48,2930.75 cw(c5486.04,2930.75) 5486.04,2941.3 5504.3,2941.3 5516.27,2953.27 5516.27,3031.69
  Bottom Layer w32: 1963.17,3008.63 ccw(c3740.16,2952.76) 1962.73,2992.25 cw(c3740.16,2952.76) 3039.81,4586.87 ; 3011.4,4574.4 cw(c3740.16,2952.76) 3039.81,4586.87 ; P1.3 3740.16,4633.16 3705,4598 3050.94,4598 3039.81,4586.87 ; P1.1 cw(c3740.16,2952.76) 5516.27,3031.69 ccw(c3740.16,2952.76) 5514.62,3062.68

## Silkscreen, mask and mechanical layers (free items; w line width, h text height)
Mechanical 1:
  circle w10: c3740.16,2952.76 r1850.39